# Altium PCB PCB1.PcbDoc (part 2 of 2)
Units mm, origin at the board's own origin, x right, y up, seen from the top; angles counter-clockwise.
Board outline 130 x 90 mm, 4 copper layers (Top Layer, GND, PWR, Bottom Layer), stack 1.506 mm thick; 78 components, 53 nets, 257 pads, 35 vias.
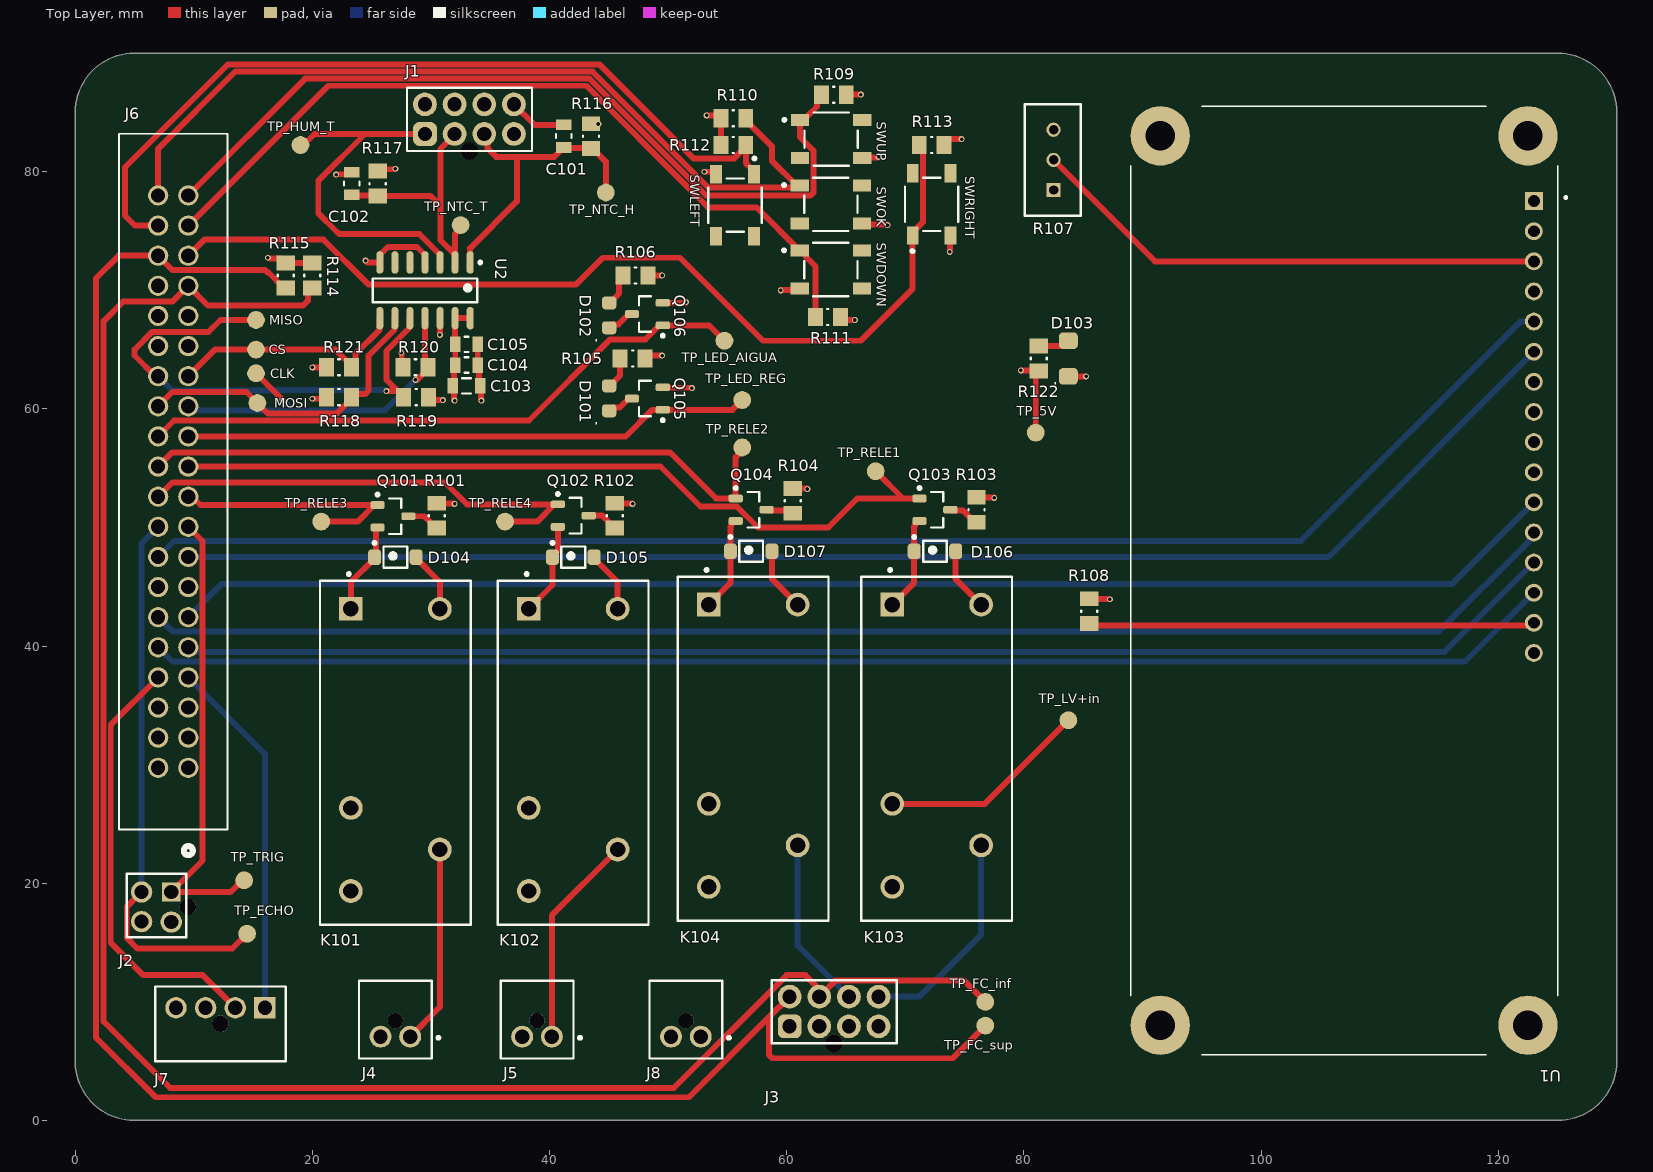
[diagram p0: Top Layer view]

## Polygon pours and split planes (outlines as drawn)
+5 on PWR "+5_LAYER" (solid, pour order 8): 0,5 0,85 cw(c5,85) 5,90 125,90 cw(c125,85) 130,85 130,5 cw(c125,5) 125,0 5,0 cw(c5,5)
LV+in on PWR "LV+IN_L03_P007" (solid, pour order 7): 74.5,29.75 74.5,24.75 55.75,24.75 55.75,5 51.63,5 51.5,5.13 51.5,13.5 51.5,24.75 21.75,24.75 21.75,29.75 21.75,24.75 21.75,29.75
GND on GND "GND_LAYER" (solid, pour order 0): 0,5 0,85 cw(c5,85) 5,90 125,90 cw(c125,85) 130,85 130,5 cw(c125,5) 125,0 5,0 cw(c5,5)

## Silkscreen, mask and mechanical layers (free items; w line width, h text height)
Mechanical 1:
  the board outline again, w0.254